# Altium PCB PCB2.PcbDoc (part 2 of 2)
Units mm, origin at the board's own origin, x right, y up, seen from the top; angles counter-clockwise.
Board outline 99.9 x 100 mm, 2 copper layers (Top Layer, Bottom Layer); 96 components, 76 nets, 354 pads, 43 vias.
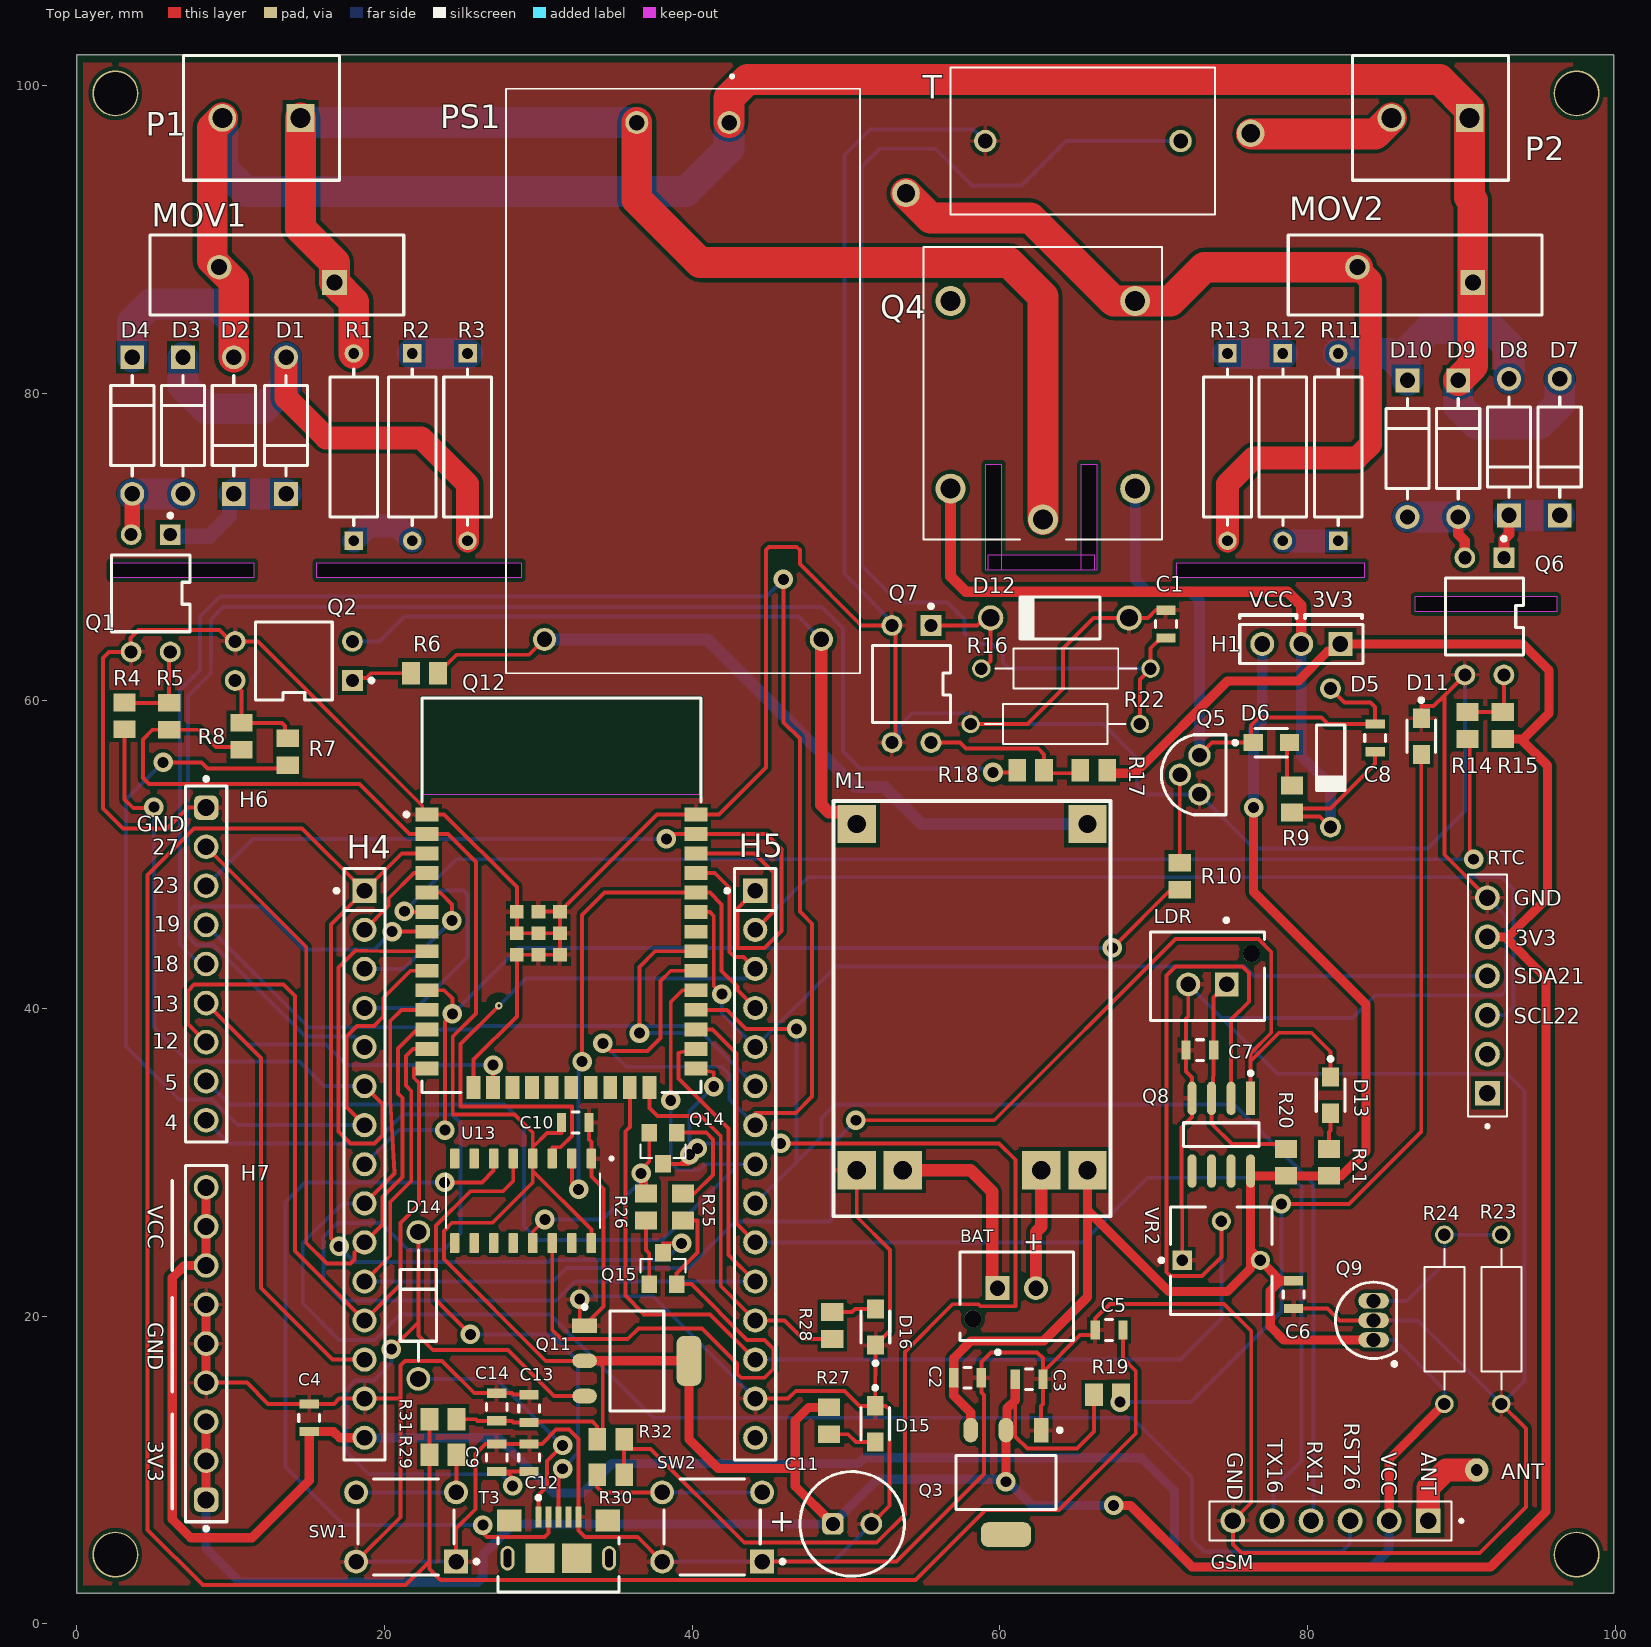
[diagram p0: Top Layer view]

## Via types
v1: diameter 1.27, hole 0.711, Top Layer to Bottom Layer, 42 vias
v2: diameter 0.5, hole 0.2, Top Layer to Bottom Layer, 1 vias

## Nets (pads, with @x,y where several pads share a name; then routed paths per layer and width w, separated by ;. In a path a pad name is that pad's centre, name@x,y a point inside that pad or via, vN(x,y) a via of type N, cw(c..) or ccw(c..) an arc to the next point about the centre after c; other vN are vias at no path point) (continued)
NetH4_10: H4.10 H6.2 Q12.12 | length 49.8
  Top Layer w0.254: H6.2 14.91,44.01 14.91,24.765 16.256,23.419 17.78,23.419 18.059,23.698 18.059,24.159 H4.10 19.866,25.966 19.866,27.752 21.162,29.048 21.162,34.204 20.882,34.484 20.882,37.409 22.123,38.65 Q12.12
NetH4_12: H4.12 H6.7 Q12.14 | length 53.1
  Top Layer w0.254: H6.7 7.214,39.006 7.214,41.148 7.62,41.554 13.437,41.554 14.173,40.818 14.173,24.247 H4.12 21.031,22.051 21.031,26.069 22.244,27.282 22.244,35.156 21.898,35.502 21.898,36.11 Q12.14
NetH4_13: H4.13 H6.6 Q12.16 | length 50.5
  Top Layer w0.254: H6.6 11.963,36.797 11.963,21.827 16.61,17.18 H4.13 ; Q12.16 v1(27.055,36.322)
  Bottom Layer w0.254: H6.6 11.102,37.658 16.19,37.658 17.526,36.322 v1(27.055,36.322)
NetH5_1: H5.1 H6.3 Q12.37 | length 52
  Top Layer w0.254: v1(38.329,51.029) 38.65,51.35 Q12.37 44.84,51.35 45.796,50.394 45.796,45.034 44.704,43.942 42.959,43.942 42.934,43.967 42.934,46.494 H5.1
  Bottom Layer w0.254: H6.3 11.449,51.029 v1(38.329,51.029)
NetH5_2: H5.2 Q12.36 RTC.3 | length 70.3
  Top Layer w0.254: Q12.36 44.052,50.08 45.288,48.844 45.288,46.308 H5.2
  Bottom Layer w0.254: H5.2 47.519,48.539 92.608,48.539 93.396,47.752 93.396,40.132 92.844,39.58 RTC.3
NetH5_3: H5.3 Q12.35 U13.3 | length 45.6
  Top Layer w0.254: v2(27.432,40.183) 24.943,37.694 24.943,33.63 32.182,33.63 32.182,31.725 31.445,30.988 30.905,30.988 U13.3 ; Q12.35 41.469,48.81 42.426,47.853 42.426,43.688 42.772,43.342 43.338,43.342 H5.3
  Bottom Layer w0.254: v2(27.432,40.183) 29.21,41.961 43.481,41.961 H5.3
NetH5_4: H5.4 Q12.34 U13.2 | length 37.7
  Top Layer w0.254: U13.2 32.175,28.683 v1(32.614,28.245) ; v1(32.842,36.551) 32.842,46.076 34.307,47.54 Q12.34 41.148,47.54 41.918,46.77 41.918,42.452 42.945,41.425 42.945,41.195 H5.4
  Bottom Layer w0.254: v1(32.614,28.245) 32.614,36.322 v1(32.842,36.551)
NetH5_5: H5.5 Q12.33 RTC.4 | length 60.9
  Top Layer w0.254: Q12.33 41.148,46.27 41.402,46.016 41.402,41.478 v1(41.935,40.945)
  Bottom Layer w0.254: v1(41.935,40.945) 41.935,39.665 H5.5 49.348,42.748 75.895,42.748 76.523,42.12 RTC.4
NetH5_6: H5.6 H6.4 Q12.31 | length 52.7
  Top Layer w0.254: v1(36.576,38.405) 36.576,42.714 37.592,43.73 Q12.31
  Bottom Layer w0.254: H6.4 15.054,38.786 22.225,38.786 22.377,38.633 25.933,38.633 26.162,38.862 40.198,38.862 40.655,38.405 ; v1(36.576,38.405) 40.655,38.405 ; H5.6 40.655,38.405
NetH5_7: H5.7 H6.5 Q12.30 | length 125.9
  Top Layer w0.254: v1(34.188,37.744) 34.696,37.236 37.084,37.236 37.948,38.1 37.948,41.8 38.608,42.46 Q12.30 ; H5.7 44.1,33.223 46.736,33.223 47.803,34.29 47.803,45.517 47,46.32 47,57.546 45.949,58.598 45.949,67.878 v1(45.926,67.9)
  Bottom Layer w0.254: H6.5 7.62,43.256 6.706,44.171 6.706,60.706 8,62 8,65.5 9.3,66.8 44.826,66.8 v1(45.926,67.9) ; v1(34.188,37.744) 35.712,36.22 41.908,36.22 42.427,35.702 42.427,34.093 H5.7
NetH5_8: H5.8 H6.8 Q12.29 | length 63.1
  Top Layer w0.254: v1(38.608,34.036) 38.608,40.428 39.37,41.19 Q12.29
  Bottom Layer w0.254: H6.8 9.923,33.757 27.813,33.757 29.058,32.512 29.058,25.857 29.972,24.943 38.075,24.943 43.012,29.88 ; v1(38.608,34.036) 38.608,29.997 39.116,29.489 40.453,29.489 40.843,29.88 43.012,29.88 ; H5.8 43.012,29.88
NetH5_11: H5.11 H6.9 Q12.26 | length 85.9
  Top Layer w0.254: Q12.26 39.116,37.126 39.116,35.458 42.367,32.207 42.367,23.993 H5.11
  Bottom Layer w0.254: H6.9 9.898,31.242 19.304,31.242 21.184,33.122 24.384,33.122 24.943,32.563 24.943,25.4 23.851,24.308 21.539,24.308 19.787,26.06 16.942,26.06 16.027,25.146 16.027,22.276 17.272,21.031 31.166,21.031 32.395,22.26 H5.11
NetH5_12: H5.12 Q12.24 R28.2 | length 25.2
  Top Layer w0.254: Q12.24 37.215,33.528 37.737,33.006 40.582,33.006 41.859,31.729 41.859,21.961 H5.12 45.999,19.72 47.194,18.525 R28.2
NetH5_13: H5.13 Q8.2 Q12.23 VR2.2 | length 101.8
  Top Layer w0.254: Q12.23 35.945,32.309 35.662,32.025 35.662,21.336 36.881,20.117 41.163,20.117 H5.13 ; VR2.2 74.4,23.854 73.152,22.606 71.095,22.606 70.841,22.86 70.841,42.164 71.425,42.748 75.768,42.748 76.2,42.316 76.2,40.444 75.035,39.279 Q8.2
  Bottom Layer w0.254: H5.13 71.739,17.18 74.4,19.841 VR2.2
NetM1_1: M1.1 PS1.4 R6.2 | length 48.1
  Top Layer w0.254: R6.2 24.675,63 29.4,63 PS1.4
  Bottom Layer w0.8: PS1.4 41,64 50.6,54.4 52.5,54.4 54.9,52 M1.1
NetM1_2: M1.2 PS1.3 Q2.2 | length 45.4
  Top Layer w0.254: PS1.3@48.4,63.663 PS1.3
  Top Layer w0.8: PS1.3@48.4,63.663 48.4,53.234 48.869,52.766 49.934,52.766 M1.2
  Bottom Layer w0.254: Q2.2 19.67,63.87 21.3,65.5 46.9,65.5 PS1.3
NetMOV1_1: MOV1.1 P1.1 PS1.2 Q4.COM R1.2 | length 86.3
  Top Layer w2: P1.1 14.54,90.71 16.75,88.5 MOV1.1 18,85.95 R1.2 ; PS1.2 36.4,92.6 40.5,88.5 60.6,88.5 62.8,86.3 Q4.COM
  Bottom Layer w2: P1.1@15.34,97.6 PS1.2
NetMOV2_2: MOV2.2 pad.2@53.9,93 Q4.NO R13.2 | length 59.1
  Top Layer w1.5: R13.2 74.8,74.1 76.5,75.8 83.221,75.8 84.1,76.679 84.1,87.323 83.25,88.173 MOV2.2
  Top Layer w2: pad.2@53.9,93 55.5,91.4 62,91.4 67.4,86 Q4.NO 71.1,86 73.3,88.2 MOV2.2
NetP2_2: P2.2 pad.2@76.3,96.9 | length 9.7
  Top Layer w0.254: pad.2@76.3,96.9 pad.2@76.35,96.85 ; P2.2@85.41,97.95 P2.2
  Top Layer w2: pad.2@76.35,96.85 84.41,96.85 P2.2
NetQ1_4: Q1.4 R4.2 R5.2 | length 6
  Top Layer w0.254: R4.2@3.5,59.875 R5.2@6.1,59.875 ; R5.2 Q1.4@6,63.308
NetQ2_1: Q2.1 R6.1 | length 4.4
  Top Layer w0.254: Q2.1@17.484,61.33 17.647,61.492 18.817,61.492 19.125,61.8 R6.1
NetQ2_4: Q2.4 R7.2 R8.2 | length 6.8
  Top Layer w0.254: Q2.4 10.29,61.043 10.7,60.633 R8.2 13.325,58.575 13.518,58.382 13.518,58.023 13.728,57.812 R7.2@14.088,57.812
NetQ5_2: Q5.2 R10.1 | length 5.1
  Top Layer w0.254: R10.1@71.7,49.692 Q5.2@71.7,54.834
NetQ6_4: Q6.4 R14.1 R15.2 | length 4.8
  Top Layer w0.254: R14.1 R15.2 92.77,59.275 Q6.4
NetQ7_4: Q7.4 R17.2 R18.2 | length 11
  Top Layer w0.254: Q7.4@55.77,57.29 57.41,57.29 57.8,56.9 62.5,56.9 62.875,56.525 R18.2 R18.2@63.1,55.275 ; R18.2@63.075,55.3 65.025,55.3 R17.2
NetQ9_3: Q9.3 R23.1 R24.2 | length 11.2
  Bottom Layer w0.254: Q9.3 86.454,21 88.9,23.446 R24.2 R23.1
NetQ12_25: Q12.25 Q14.3 R30.1 R32.2 | length 84.7
  Top Layer w0.254: R30.1 R32.2@35.575,11.379 ; R32.2 R32.2@35.575,11.379 ; Q14.3 39.222,29.9 ; v1(39.827,30.505) 39.222,29.9 ; Q12.25 41.402,35.856 v1(41.402,34.925) ; v1(40.335,30.916) 40.335,30.48 39.755,29.9 39.222,29.9 ; v1(45.745,31.242) 59.944,31.242 61.011,30.175 61.011,20.65 58.742,20.65 58.615,20.777 56.921,20.777 53.829,17.685 53.829,7.112 52,5.283 43.383,5.283 37.287,11.379 R32.2@35.575,11.379
  Bottom Layer w0.254: v1(39.827,30.505) 39.827,33.35 v1(41.402,34.925) ; v1(40.335,30.916) 40.661,31.242 v1(45.745,31.242)
NetQ14_1: Q14.1 R25.1 | length 7.3
  Top Layer w0.254: Q14.1 40.915,31.932 41.351,31.496 41.351,29.194 40.132,27.975 R25.1
NetQ14_2: Q14.2 R26.1 U13.13 | length 15.3
  Top Layer w0.254: U13.13 29.635,25.495 v1(30.429,26.289) ; v1(36.678,29.286) 36.678,27.975 R26.1 37,29.845 37.211,30.056 Q14.2
  Bottom Layer w0.254: v1(30.429,26.289) 34.163,26.289 36.678,28.804 v1(36.678,29.286)
NetQ15_1: Q15.1 R26.2 | length 4.2
  Top Layer w0.254: R26.2 37,24.3 37.211,24.089 Q15.1
NetQ15_2: Q15.2 R25.2 U13.14 | length 37.5
  Top Layer w0.254: U13.14 30.905,19.108 31.496,18.517 35.814,18.517 36.5,19.202 40.64,19.202 42.926,16.916 42.926,16.256 43.18,16.002 44.704,16.002 45.288,16.586 45.288,17.882 44.704,18.466 43.561,18.466 39.943,22.084 Q15.2 38.989,22.784 40.335,24.13 40.335,26.225 R25.2
NetR1_1: R1.1 R2.2 | length 4.6
  Bottom Layer w1.5: R1.1 18.972,71.382 20.828,71.382 R2.2
NetR2_1: R2.1 R3.1 | length 3.6
  Bottom Layer w2: R2.1 R3.1
NetR11_1: R11.1 R12.2 | length 3.6
  Bottom Layer w1.5: R12.2 R11.1
NetR12_1: R12.1 R13.1 | length 3.6
  Bottom Layer w2: R13.1 R12.1
NetR29_2: R29.2 SW1.3 SW1.4 | length 9
  Top Layer w0.254: SW1.3 24.65,9.327 24.675,9.352 R29.2
  Bottom Layer w0.254: SW1.4 SW1.3
NetR30_2: R30.2 SW2.3 SW2.4 | length 11.7
  Top Layer w0.254: R30.2 33.825,8.89 34.165,8.55 SW2.4
  Bottom Layer w0.254: SW2.4 SW2.3
NetT3_2: T3.2 U13.6 | length 52.8
  Top Layer w0.254: v1(23.901,28.702) 26.333,28.702 27.095,29.464 U13.6 ; v1(26.391,6.426) 26.391,5.918 26.67,5.639 30.396,5.639 30.65,5.893 T3.2
  Bottom Layer w0.254: v1(23.901,28.702) 14.834,28.702 13.564,27.432 13.564,10.185 17.323,6.426 v1(26.391,6.426)
NetT3_3: T3.3 U13.5 | length 34.1
  Top Layer w0.254: v1(25.578,18.821) 23.352,21.047 23.352,25.901 25.576,28.125 27.701,28.125 28.365,28.789 U13.5 ; T3.3 31.3,9.812 v1(31.572,10.084)
  Bottom Layer w0.254: v1(25.578,18.821) 30.861,18.821 32.588,17.094 32.588,11.1 v1(31.572,10.084)
VCC: C2.1 C4.2 C6.2 GSM.2 H1.3 H4.15 H7.7 H7.8 H7.9 M1.3 Q3.3 Q8.8 Q9.1 R20.1 R21.1 R24.1 VR2.3 | length 235.6
  Top Layer w0.254: Q8.8 76.616,29.125 ; R21.1 82.186,29.125 ; Q9.1@83.795,18.46 Q9.1
  Top Layer w0.6: H7.9 H7.8 H7.7 7,23.3 6.2,22.5 6.2,6.8 7.395,5.605 11.381,5.605 15.1,9.324 C4.2 16.688,12.5 17.088,12.1 H4.15 ; Q3.3 58.11,13.741 57,14.851 57,17.272 58.114,18.386 62.836,18.386 65.7,21.25 65.7,26.898 ; M1.3 65.7,26.898 ; Q8.8 76.305,24.27 ; v1(76.5,53.069) 76.5,47.579 83.8,40.279 83.8,30.739 82.186,29.125 ; 76.616,29.125 R20.1 R21.1 ; C6.2 78.232,22.3 ; Q9.1@83.795,18.46 78.46,18.46 77.58,19.34 77.58,21.648 78.232,22.3 ; GSM.2 85.31,10.71 R24.1 ; 65.7,26.898 70.998,21.6 74.788,21.6 76.305,23.117 76.305,24.27 ; 76.305,24.27 VR2.3 78.232,22.3
  Bottom Layer w0.254: Q9.1 85.655,18.46 88.9,15.215 R24.1
  Bottom Layer w0.6: H4.15 27.4,12.1 31,8.5 32.858,8.5 34.787,10.429 50.829,10.429 51.2,10.8 69.2,10.8 71.348,8.652 71.348,4.852 72.5,3.7 84.2,3.7 85.3,4.8 85.3,6.69 GSM.2
  Bottom Layer w0.7: v1(76.5,53.069) 76.5,58.164 77.06,58.724 H1.3
pads on no net: BAT. H5.15 LDR. Q3.4 Q4.NC Q8.5 Q8.6 Q8.7 Q12.17 Q12.18 Q12.19 Q12.20 Q12.21 Q12.22 Q12.32 RTC.1 RTC.2 T3.4 T3.6 T3.7 T3.8 T3.9 T3.10 T3.11 U13.7 U13.8 U13.9 U13.10 U13.11 U13.12 U13.15

## Polygon pours and split planes (outlines as drawn)
GND on Top Layer "GND_L01_P000" (solid, pour order 0): 99.5,101.5 99.5,2.5 0.4,2.5 0.4,101.5
GND on Bottom Layer "GND_L02_P001" (solid, pour order 1): 0.4,101.5 99.5,101.5 99.5,2.5 0.4,2.5

## Silkscreen, mask and mechanical layers (free items; w line width, h text height)
Top Overlay:
  lines w0.254: 6.2,7.5 6.2,13.2 6.2,13.6 ; 6.2,15.1 6.2,21.2 ; 6.2,23 6.2,28.8 ; 75.6,65.4 75.6,65.6 79.3,65.6 79.3,65.4 ; 79.85,65.4 79.85,65.6 83.55,65.6 83.55,65.4
  text "VCC" at 76.2,66.1 h1
  text "3V3" at 80.3,66.1 h1
  text "GND" at 3.9,51.5 h1
  text "27" at 4.9,50 h1
  text "23" at 4.9,47.5 h1
  text "GND" at 93.4,46.7 h1
  text "19" at 5,45 h1
  text "3V3" at 93.5,44.1 h1
  text "18" at 4.9,42.4 h1
  text "SDA21" at 93.4,41.6 h1
  text "13" at 4.9,39.8 h1
  text "SCL22" at 93.4,39 h1
  text "12" at 4.9,37.4 h1
  text "5" at 5.7,34.7 h1
  text "4" at 5.7,32.1 h1
  text "VCC" at 4.6,27.2 h1 r270
  text "+" at 61.7,25.5 h1.2 r270
  text "GND" at 4.6,19.6 h1 r270
  text "RST26" at 82.4,13.065 h1 r270
  text "TX16" at 77.4,11.999 h1 r270
  text "3V3" at 4.6,11.9 h1 r270
  text "RX17" at 80,11.899 h1 r270
  text "GND" at 74.8,11.166 h1 r270
  text "VCC" at 84.8,11.166 h1 r270
  text "ANT" at 87.4,11.166 h1 r270
  text "ANT" at 92.6,9.4 h1
Mechanical 1:
  lines w0.254: 2.2,68 11.5,68 11.5,69 2.2,69 2.2,68 ; 15.6,68 28.9,68 28.9,69 15.6,69 15.6,68

## Text inside footprints (layer, text, board x,y; h text height)
C11: Top Overlay "+" at 46.7,7.25 h1.5 r180